# Altium PCB Copy of PCB1.PcbDoc
Units mil, origin at the board's own origin, x right, y up, seen from the top; angles counter-clockwise.
Board outline 5045.03 x 3965.01 mil, 2 copper layers (Top Layer, Bottom Layer); 78 components, 73 nets, 208 pads, 104 vias.
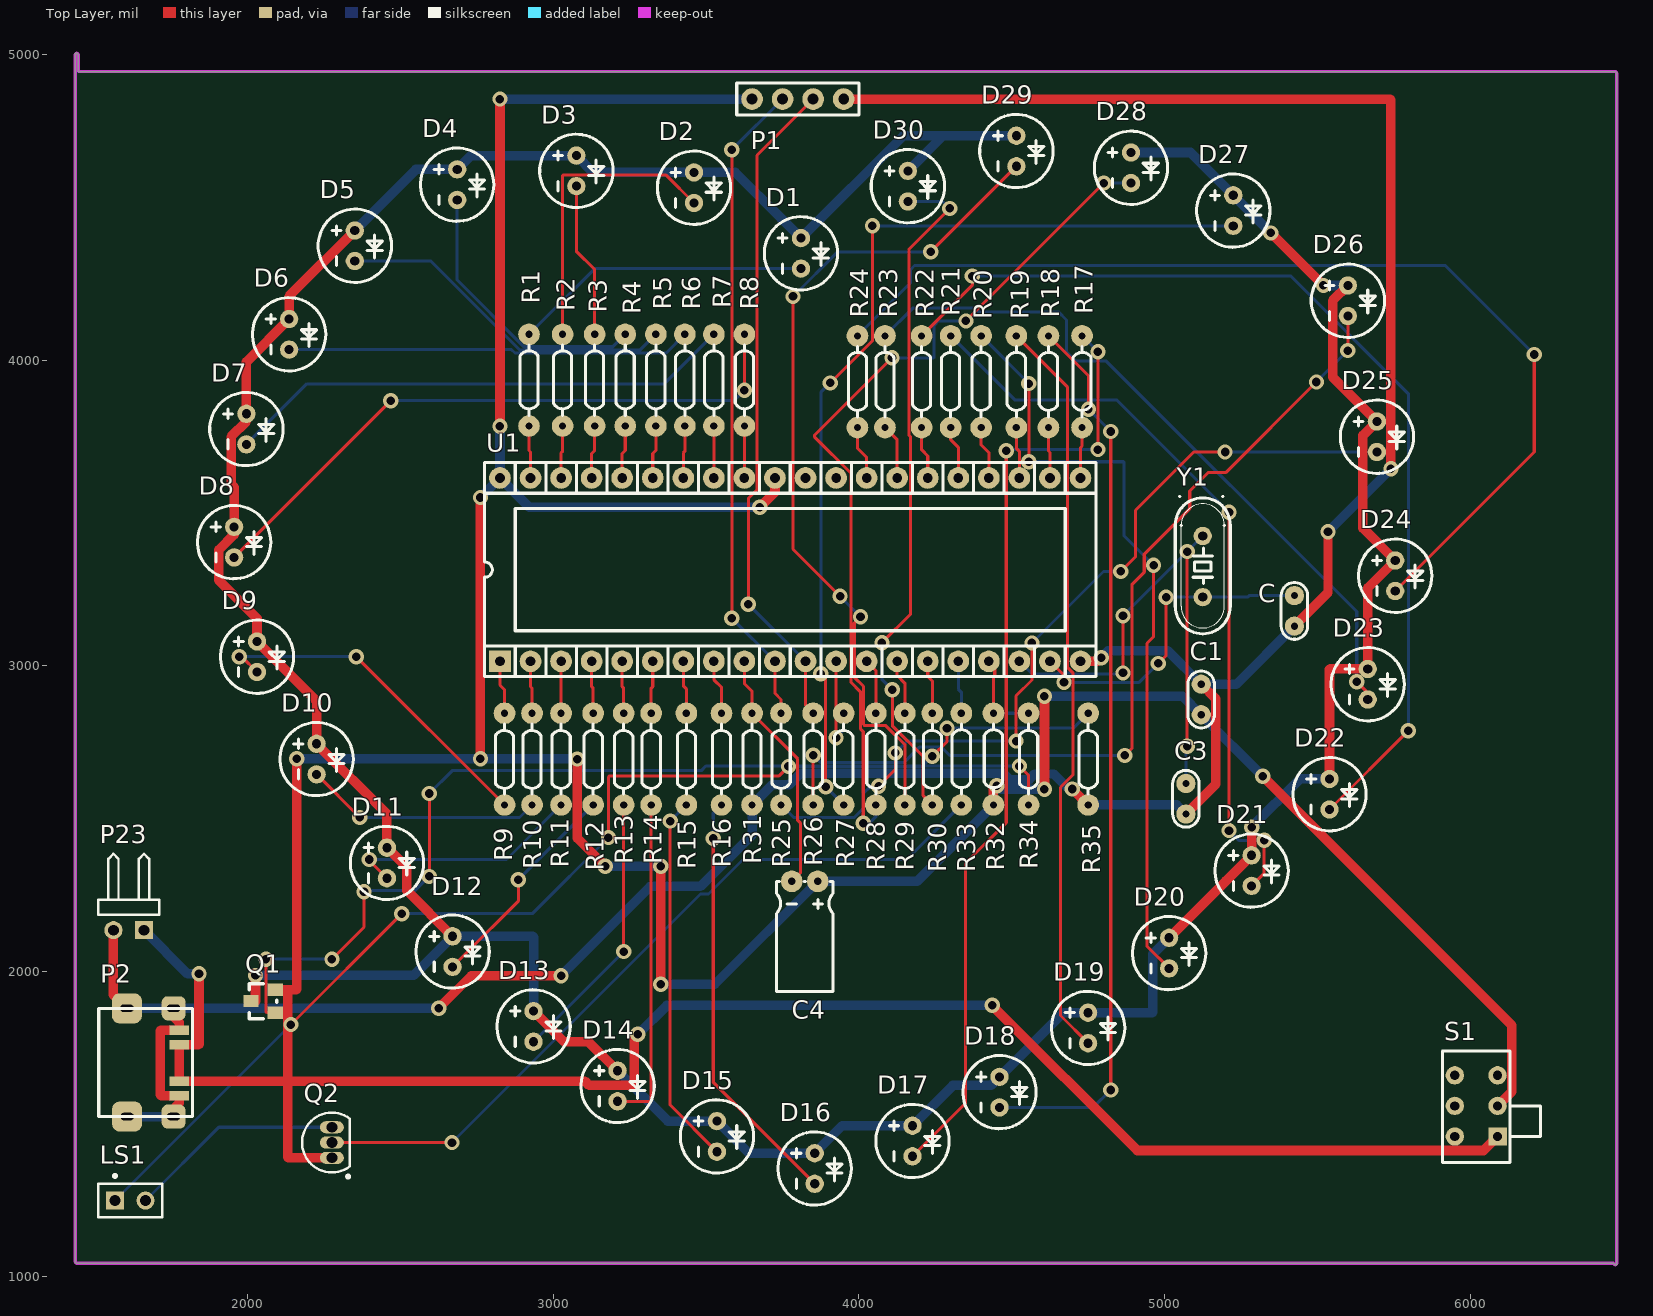
[diagram p0: Top Layer view]
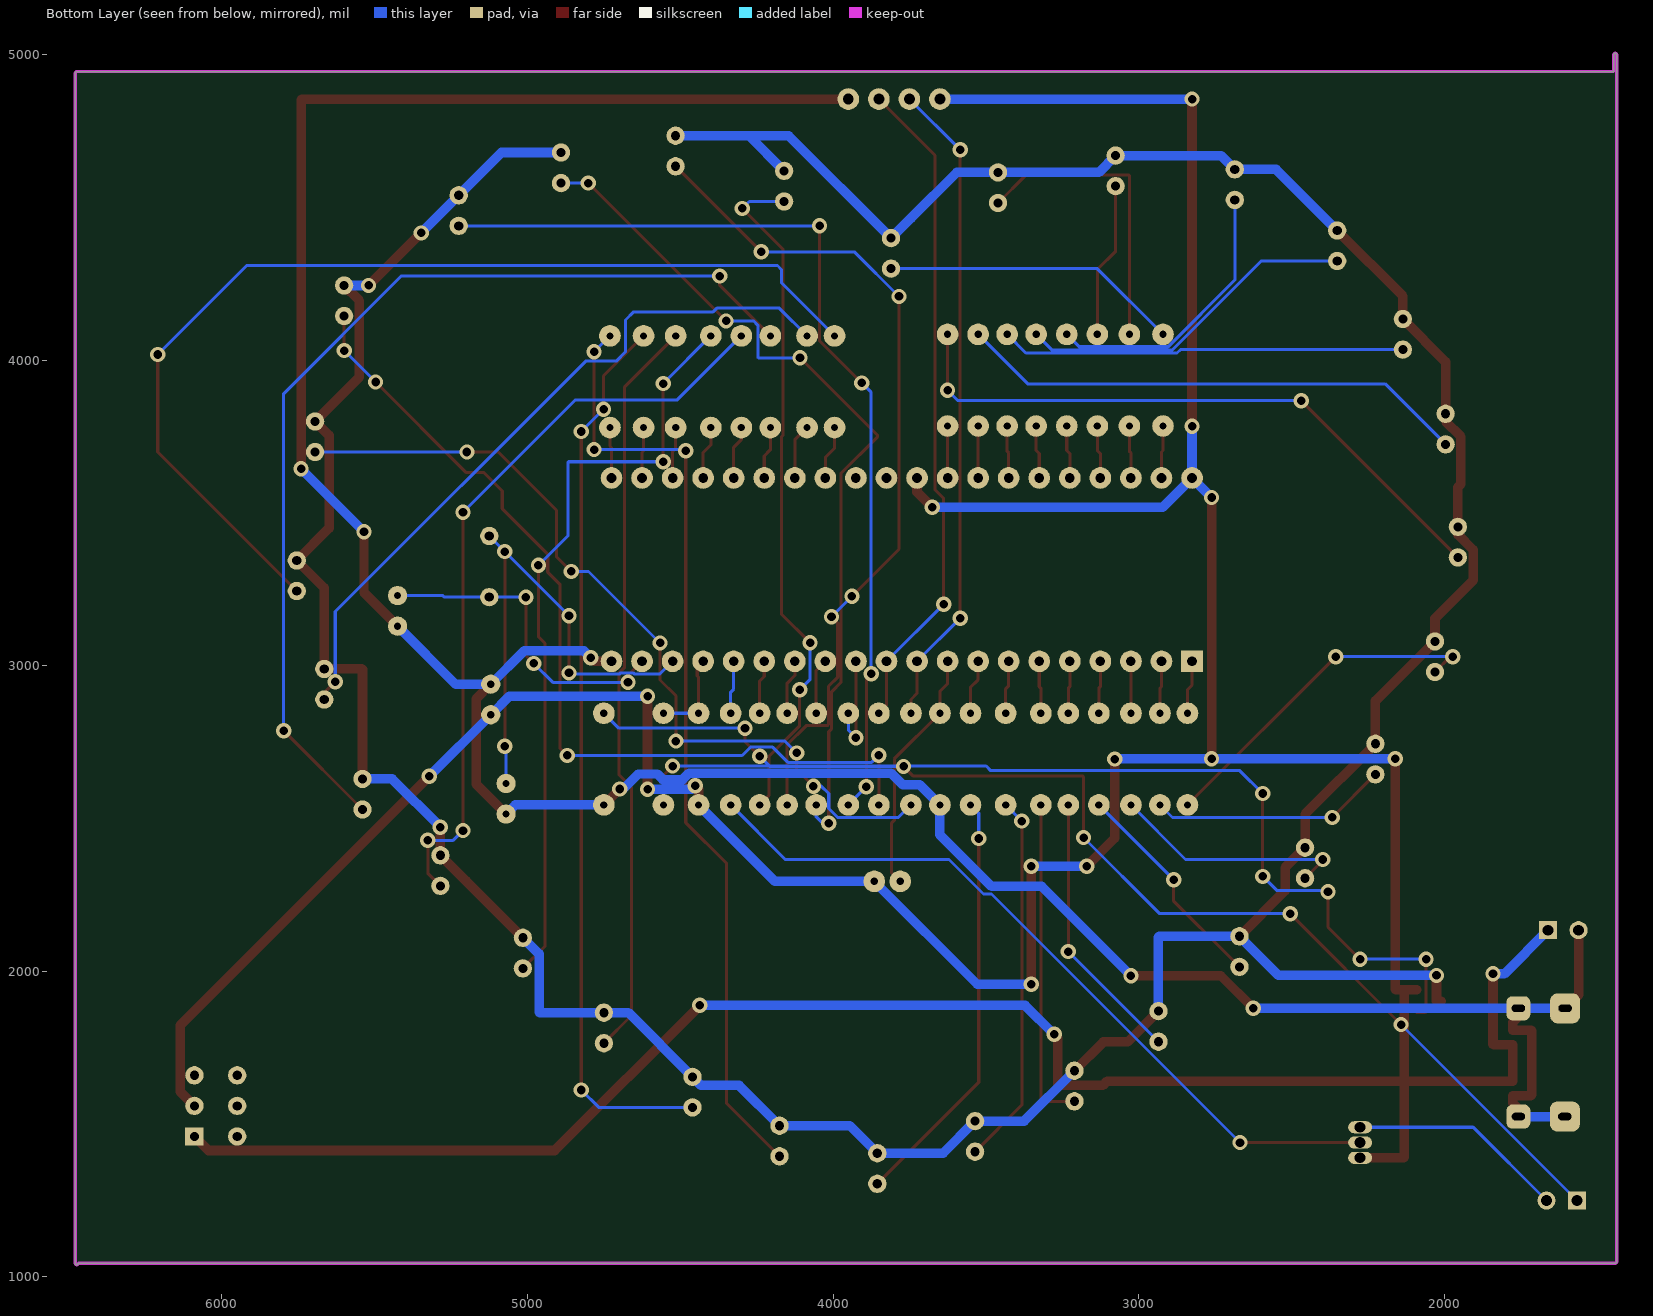
[diagram p1: Bottom Layer view, seen from below]

## Layer stack, top to bottom
Top Solder: solder mask 0.4, Solder Resist, Dk 3.5
Top Layer: signal copper 1.4
Dielectric 1: dielectric 12.6, FR-4, Dk 4.8
Bottom Layer: signal copper 1.4
Bottom Solder: solder mask 0.4, Solder Resist, Dk 3.5

## Board outline
1434.98,1050 ccw(c1440,1050) 1440,1044.98 6469.98,1044.98 ccw(c6475,1045) 6480.02,1045 6480.02,4940 ccw(c6475,4940) 6475,4945.02 1445.02,4945.02 1445.02,5000 ccw(c1440,5000) 1434.98,5000

## Design rules (kind name [scope] priority, off if disabled: settings)
Clearance [All] p1: gap=0.1 ignorepadtopadclearanceinfootprint=TRUE
MinimumSolderMaskSliver [All] p1: minsoldermaskwidth=1
PolygonConnect [All] p1: connectstyle=Relief reliefconductorwidth=10 reliefentries=4 polygonreliefangle="90 Angle" airgapwidth=10
RoutingVias [All] p1: holewidth=28 width=50 viastyle="Through Hole" minholewidth=28 minwidth=50 maxholewidth=28 maxwidth=50
SilkToSilkClearance [All] p1: silktosilkclearance=1
SilkToSolderMaskClearance [IsPad] p1: minsilkscreentomaskgap=0 clearancetoexposedcopper=TRUE
SolderMaskExpansion [All] p1: expansion=4 istentingtop=FALSE
Width Width_4 [InNet('No Net')] p1: maxlimit=10 minlimit=10 preferedwidth=10
Width Width_3 [InNet('+5')] p2: maxlimit=31.5 minlimit=10 preferedwidth=31.5
Width Width_2 [InNet('+5V')] p3: maxlimit=31.5 minlimit=10 preferedwidth=31.5
Width Width_1 [InNet('GND')] p4: maxlimit=39.37 minlimit=10 preferedwidth=31
Width [InNet('+5VUSB')] p5: maxlimit=31.5 minlimit=10 preferedwidth=31.5
27 further rules are at their usual default settings.

## Components (designator, comment, footprint, x,y, rotation, side; value= is the part's Value field where it differs from the comment)
C "Cap" C-0.1 5425,3130 r90 top value=100pF
C1 "Cap" C-0.1 5120,2840 r90 top value=100pF
C3 "Cap" C-0.1 5070,2515 r90 top value=100pF
C4 "Cap Pol1" CD-0.2T 3865,2295 r270 top value=100pF
D1 "LED0" led5 3805,4365 r270 top
D2 "LED0" led5 3455,4580 r270 top
D3 "LED0" led5 3070,4635 r270 top
D4 "LED0" led5 2680,4590 r270 top
D5 "LED0" led5 2345,4390 r270 top
D6 "LED0" led5 2130,4100 r270 top
D7 "LED0" led5 1990,3790 r270 top
D8 "LED0" led5 1950,3420 r270 top
D9 "LED0" led5 2025,3045 r270 top
D10 "LED0" led5 2220,2710 r270 top
D11 "LED0" led5 2450,2370 r270 top
D12 "LED0" led5 2665,2080 r270 top
D13 "LED0" led5 2930,1835 r270 top
D14 "LED0" led5 3205,1640 r270 top
D15 "LED0" led5 3530,1475 r270 top
D16 "LED0" led5 3850,1370 r270 top
D17 "LED0" led5 4170,1460 r270 top
D18 "LED0" led5 4455,1620 r270 top
D19 "LED0" led5 4745,1830 r270 top
D20 "LED0" led5 5010,2075 r270 top
D21 "LED0" led5 5280,2345 r270 top
D22 "LED0" led5 5535,2595 r270 top
D23 "LED0" led5 5660,2955 r270 top
D24 "LED0" led5 5750,3310 r270 top
D25 "LED0" led5 5690,3765 r270 top
D26 "LED0" led5 5595,4210 r270 top
D27 "LED0" led5 5220,4505 r270 top
D28 "LED0" led5 4885,4645 r270 top
D29 "LED0" led5 4510,4700 r270 top
D30 "LED0" led5 4155,4585 r270 top
LS1 "Bell" PIN2 1565,1250 r0 top
P1 "Header 4H" SIP4 3650,4855 r0 top
P2 "USB TYPE-C" USBTYPEC6 1757,1525 r90 top
P23 "Header 2H" HDR1X2H 1660,2135 r180 top
Q1 "PMOS-2" sot23 2090,1865 r90 top
Q2 "2N3906" TO-92A 2275,1440 r0 top
R1 "Res2" R-0.3 2920,4085 r270 top value=1K
R2 "Res2" R-0.3 3030,4085 r270 top value=1K
R3 "Res2" R-0.3 3135,4085 r270 top value=1K
R4 "Res2" R-0.3 3235,4085 r270 top value=1K
R5 "Res2" R-0.3 3335,4085 r270 top value=1K
R6 "Res2" R-0.3 3430,4085 r270 top value=1K
R7 "Res2" R-0.3 3525,4085 r270 top value=1K
R8 "Res2" R-0.3 3625,4085 r270 top value=1K
R9 "Res2" R-0.3 2840,2545 r90 top value=1K
R10 "Res2" R-0.3 2930,2545 r90 top value=1K
R11 "Res2" R-0.3 3025,2545 r90 top value=1K
R12 "Res2" R-0.3 3130,2545 r90 top value=1K
R13 "Res2" R-0.3 3230,2545 r90 top value=1K
R14 "Res2" R-0.3 3320,2545 r90 top value=1K
R15 "Res2" R-0.3 3435,2545 r90 top value=1K
R16 "Res2" R-0.3 3550,2545 r90 top value=1K
R17 "Res2" R-0.3 4730,4080 r270 top value=1K
R18 "Res2" R-0.3 4620,4080 r270 top value=1K
R19 "Res2" R-0.3 4515,4080 r270 top value=1K
R20 "Res2" R-0.3 4400,4080 r270 top value=1K
R21 "Res2" R-0.3 4300,4080 r270 top value=1K
R22 "Res2" R-0.3 4205,4080 r270 top value=1K
R23 "Res2" R-0.3 4085,4080 r270 top value=1K
R24 "Res2" R-0.3 3995,4080 r270 top value=1K
R25 "Res2" R-0.3 3745,2545 r90 top value=1K
R26 "Res2" R-0.3 3850,2545 r90 top value=1K
R27 "Res2" R-0.3 3950,2545 r90 top value=1K
R28 "Res2" R-0.3 4055,2545 r90 top value=1K
R29 "Res2" R-0.3 4150,2545 r90 top value=1K
R30 "Res2" R-0.3 4240,2545 r90 top value=1K
R31 "Res2" R-0.3 3650,2545 r90 top value=1K
R32 "Res2" R-0.3 4440,2845 r270 top value=1K
R33 "Res2" R-0.3 4335,2845 r270 top value=1K
R34 "Res2" R-0.3 4555,2545 r90 top value=1K
R35 "Res2" R-0.3 4750,2545 r90 top value=1K
S1 "SW-SPST" onoff 6035,1490 r90 top
U1 "P89C51RC2BN/01" DIP40 2825,3015 r90 top
Y1 "XTAL" jz 5135,3330 r90 top

## Footprints (in the part's own frame and the unit in brackets; to place one, negate y for a bottom-side part, rotate by r counter-clockwise, add the part's x,y. Pads: shape width x height; smd on the part's side, far side on the other; paste and mask are expansions set on the pad)
C-0.1 [mm]
  round 1.6 hole 0.6: 1(0,0) 2(2.54,0)
  silkscreen extent -1.09,-1.1 3.63,1.1
CD-0.2T [mm]
  round 1.8 hole 0.6: 1(0,0) 2(0,-2.159)
  silkscreen extent 0,-3.43 9.14,1.27
DIP40 [mm]
  rect 1.8x1.8 hole 0.8: 1(0,0)
  round 1.8 hole 0.8: 2(0,-2.54) 3(0,-5.08) 4(0,-7.62) 5(0,-10.16) 6(0,-12.7) 7(0,-15.24) 8(0,-17.78) 9(0,-20.32) 10(0,-22.86) 11(0,-25.4) 12(0,-27.94) 13(0,-30.48) 14(0,-33.02) 15(0,-35.56) 16(0,-38.1) 17(0,-40.64) 18(0,-43.18) 19(0,-45.72) 20(0,-48.26) 21(15.24,-48.26) 22(15.24,-45.72) 23(15.24,-43.18) 24(15.24,-40.64) 25(15.24,-38.1) 26(15.24,-35.56) 27(15.24,-33.02) 28(15.24,-30.48) 29(15.24,-27.94) 30(15.24,-25.4) 31(15.24,-22.86) 32(15.24,-20.32) 33(15.24,-17.78) 34(15.24,-15.24) 35(15.24,-12.7) 36(15.24,-10.16) 37(15.24,-7.62) 38(15.24,-5.08) 39(15.24,-2.54) 40(15.24,0)
  silkscreen extent -1.27,-49.53 16.51,1.27
HDR1X2H [mm] "Connector; Header; 2 Position; Right Angle"
  rect 1.5x1.5 hole 0.9: 1(0,0)
  round 1.5 hole 0.9: 2(2.54,0)
  silkscreen extent -1.27,-6.35 3.81,-1.27
jz [mil]
  round 60 hole 30: 1(-105,10) 2(95,10)
  silkscreen extent -225,-80 225,100
led5 [mil]
  round 60 hole 30: 1(-35,5) 2(65,5)
  silkscreen extent -105,-115 135,125
onoff [mil]
  rect 60x60 hole 30: 1(-30,-55)
  round 60 hole 30: 2(70,-55) 3(170,-55) 4(170,85) 5(70,85) 6(-30,85)
  silkscreen extent -115,-195 250,125
PIN2 [mm] "Photosensitive Diode; 2 Leads"
  rect 1.5x1.5 hole 0.9: 1(0,0)
  round 1.5 hole 0.9: 2(2.54,0)
  silkscreen extent -1.4,-1.4 3.94,2.17
R-0.3 [mm]
  round 1.8 hole 0.6: 1(0,0) 2(7.62,0)
  silkscreen extent 0.89,-0.76 6.73,0.75
SIP4 [mm]
  round 1.8 hole 0.9: 1(0,0) 2(2.54,0) 3(5.08,0) 4(7.62,0)
  silkscreen extent -1.27,-1.32 8.89,1.35
sot23 [mil]
  rect 40x50 smd: 1(0,0) 2(75,0) 3(38,80)
  silkscreen extent -20,-5 95,85
TO-92A [mm] "TO, Flat Index; 3 In-Line, Axial Leads; Body Dia. 4.5mm; Leads 0.51 x 0.48 mm (max)"
  oval 2x1 hole 0.9: 1(0,-1.27) 2(0,0) 3(0,1.27)
  silkscreen extent -2.48,-2.95 1.5,2.48, body extent -2.48,-2.5 1.5,2.5, height 6.86
USBTYPEC6 [mm]
  rrect50% 2.5x2.5 hole 0.6 slot 1.1 at 90 deg: 0(0,3.861) 0(9,3.886)
  rrect50% 2x2 hole 0.6 slot 1.1 at 90 deg: 0(0,0) 0(9,0)
  rect 0.8x1.6 smd: 1(1.727,-0.457) 2(2.946,-0.457) 5(5.972,-0.457) 6(7.188,-0.457)
  silkscreen extent 0,-1.57 9,6.22

## Part data
C C1 C3: "Capacitor", LatestRevisionDate=17-Jul-2002, LatestRevisionNote="Re-released for DXP Platform.", PackageDescription="Radial Cap, Thru-Hole; 2 Leads; 0.3 in Pin Spacing", PackageReference=RAD-0.3, Published=8-Jun-2000, Publisher="Altium Limited"
C4: "Polarized Capacitor (Radial)", LatestRevisionDate=17-Jul-2002, LatestRevisionNote="Re-released for DXP Platform.", PackageDescription="Polarized Capacitor (Radial); 2 Leads", PackageReference=RB7.6-15, Published=8-Jun-2000, Publisher="Altium Limited"
D1 D2 D3 D4 D5 D6 D7 D8 D9 D10 D11 D12 D13 D14 D15 D16 D17 D18 D19 D20 D21 D22 D23 D24 D25 D26 D27 D28 D29 D30: "Typical INFRARED GaAs LED", LatestRevisionDate=08-Jul-2005, LatestRevisionNote="Mech Layer 1 removed.", PackageDescription="LED; 2 Leads", PackageReference=LED-0, Published=8-Jun-2000, Publisher="Altium Limited"
LS1: "Electrical Bell", LatestRevisionDate=17-Jul-2002, LatestRevisionNote="Re-released for DXP Platform.", PackageReference=PIN2, Published=24-Mar-1999, Publisher="Altium Limited"
P1: "Header, 4-Pin, Right Angle", LatestRevisionDate=17-Jul-2002, LatestRevisionNote="Re-released for DXP Platform.", Publisher="Altium Limited"
P2: library part "USB TYPE-C 6P", Current Rating - Power (Max)=5A, JLCPCB Part Class="Extended Part", Manufacturer Part="TYPE-C 6P CB1.6(073)", Add into BOM=yes, Connector Type=Type-C, Convert to PCB=yes, Datasheet=https://atta.szlcsc.com/upload/public/pdf/source/20220408/7E0E465C11F85B3C51A520D1219A5616.pdf, Device="TYPE-C 6P CB1.6(073)", Number of Contacts=6P, Number of Ports=1, Standard=-, Supplier=LCSC, Supplier Footprint=SMD, Supplier Part=C2858274, Symbol="TYPE-C 6P CB1.6(073)"
P23: "Header, 2-Pin, Right Angle", LatestRevisionDate=17-Jul-2002, LatestRevisionNote="Re-released for DXP Platform.", Publisher="Altium Limited"
Q1: library part AO3401, "P-Channel Power MOSFET", Code_JEDEC=TO-220-AB, ComponentLink1Description="Manufacturer Link", ComponentLink1URL=http://www.irf.com/, DatasheetDocument=PD-9.390D, LatestRevisionDate=17-Jul-2002, LatestRevisionNote="Re-released for DXP Platform.", Note="Pin 4 not drawn and electrically connected to Pin 2.", PackageReference=TO-220AB, Published=8-Jun-2000, Publisher="Altium Limited"
Q2: "PNP General Purpose Amplifier", ComponentLink1Description="Manufacturer Link", ComponentLink1URL=http://www.fairchildsemi.com/, ComponentLink2Description=Datasheet, ComponentLink2URL=http://www.fairchildsemi.com/ds/2N%2F2N3906.pdf, DatasheetVersion=1997, LatestRevisionDate=15-Jan-2003, LatestRevisionNote="PCB Footprint 'BCY-W3/D4.7' replaced", PackageDescription="TO, Flat Index; 3 In-Line, Axial Leads; Body Dia. 4.5mm; Leads 0.51 x 0.48 mm (max)", PackageReference=TO-92A, PackageVersion=Sep-1998, Published=8-Jun-2000, Publisher="Altium Limited"
R1 R2 R3 R4 R5 R6 R7 R8 R9 R10 R11 R12 R13 R14 R15 R16 R17 R18 R19 R20 R21 R22 R23 R24 R25 R26 R27 R28 R29 R30 R31 R32 R33 R34 R35: "Resistor", LatestRevisionDate=17-Jul-2002, LatestRevisionNote="Re-released for DXP Platform.", PackageDescription="Axial Device, Thru-Hole; 2 Leads; 0.4 in Pin Spacing", PackageReference=AXIAL-0.4, Published=8-Jun-2000, Publisher="Altium Limited"
S1: "Single-Pole, Single-Throw Switch", LatestRevisionDate=17-Jul-2002, LatestRevisionNote="Re-released for DXP Platform.", PackageDescription="Switch; 2 Leads", PackageReference=SPST-2, Published=24-Mar-1999, Publisher="Altium Limited"
U1: "80C51 8-Bit Flash Microcontroller Family, 32 kB ISP/IAP Flash with 512 B RAM.", Code_JEDEC=MO-015, ComponentLink1Description="Manufacturer Link", ComponentLink1URL=http://www-us2.semiconductors.philips.com/, ComponentLink2Description=Datasheet, ComponentLink2URL=http://www.semiconductors.philips.com/acrobat/datasheets/P89C51RA2_RB2_RC2_RD2_2.pdf, DatasheetVersion=18-Jul-2002, PackageDescription="DIP, Plastic; 40 Leads; Row Spacing 15.24 mm; Pitch 2.54 mm", PackageReference=SOT129-1, PackageVersion=Aug-2000, Published=21-May-2003, Publisher="Altium Limited"
Y1: "Crystal Oscillator", LatestRevisionDate=17-Jul-2002, LatestRevisionNote="Re-released for DXP Platform.", PackageDescription="Crystal, Thru-Hole; 2 Leads; Body 3.1 x 8.2 mm (Dia.xH)", PackageReference=R38, Published=8-Jun-2000, Publisher="Altium Limited"

## Via types
v1: diameter 50, hole 28, Top Layer to Bottom Layer, 104 vias

## Nets (pads, with @x,y where several pads share a name; then routed paths per layer and width w, separated by ;. In a path a pad name is that pad's centre, name@x,y a point inside that pad or via, vN(x,y) a via of type N, cw(c..) or ccw(c..) an arc to the next point about the centre after c; other vN are vias at no path point)
+5: D1.1 D2.1 D3.1 D4.1 D5.1 D6.1 D7.1 D8.1 D9.1 D10.1 D11.1 D12.1 D13.1 D14.1 D15.1 D16.1 D17.1 D18.1 D19.1 D20.1 D21.1 D22.1 D23.1 D24.1 D25.1 D26.1 D27.1 D28.1 D29.1 D30.1 Q1.3 | length 13324.5
  Top Layer w31.5: Q1.3 2025,1903 v1(2025,1987) ; D5.1 2135,4210 D6.1 1995,3995 D7.1 1995,3800 1945,3750 1945,3595 1955,3585 D8.1 1955,3430 1905,3380 1905,3280 2030,3155 D9.1 2225,2885 D10.1 2455,2515 D11.1 2520.55,2339.45 2520.55,2264.45 D12.1 ; D13.1 3035.41,1769.59 3115.41,1769.59 D14.1 ; D20.1 5201.18,2296.18 D21.1 v1(5285,2472) ; v1(5348,4417) v1(5520,4245) ; D22.1 5540,2988 5542,2990 D23.1 5665,3255 D24.1 5649,3451 5649,3754 D25.1 5550.18,3944.82 5550.18,4195.18 D26.1
  Bottom Layer w31.5: v1(2025,1987) 2542,1987 D12.1 2932,2115 2935,2112 D13.1 ; D5.1 2550,4625 D4.1 2730,4670 D3.1 3130,4615 D2.1 3595,4615 3744.1,4465.9 D1.1 4145,4735 D29.1 4275,4735 D30.1 ; D14.1 3375,1510 D15.1 3640,1405 D16.1 3945,1495 D17.1 4307.03,1627.03 4432.03,1627.03 D18.1 4670,1865 D19.1 4960,1865 4962,1867 4962,2057 D20.1 ; D28.1 5085,4680 D27.1 v1(5348,4417) ; v1(5285,2472) 5443,2630 D22.1 ; v1(5520,4245) D26.1
+5V: C1.1 C4.1 P1.1 Q1.2 Q2.1 R32.2 S1.2 U1.31 U1.40 | length 12518.3
  Top Layer w31.5: v1(2160,2696) 2160,1942 2158,1940 Q1.2 2129,1940 2131,1938 2131,1392 2133,1390 Q2.1 ; v1(2825,3784) v1(2825,4855) ; v1(3078,2695) 3078,2436 v1(3170,2344) ; v1(3351,1958) v1(3351,2344) ; v1(3675,3519) 3725,3569 U1.31 ; R32.2 4440,2597 v1(4451,2608) ; v1(4607,2596) v1(4607,2901) ; v1(5321,2639) 6136,1824 6136,1606 S1.2 ; v1(2761,2696) v1(2761,3551) v1(2761,2696)
  Bottom Layer w31.5: v1(2160,2696) v1(2761,2696) 3077,2696 v1(3078,2695) ; v1(2825,3784) U1.40 ; v1(2825,4855) P1.1 ; v1(3170,2344) v1(3351,2344) ; v1(3351,1958) 3528,1958 C4.1 4190,2295 R32.2 ; v1(3675,3519) 2921,3519 U1.40 ; v1(4451,2608) 4462.72,2596.28 4606.72,2596.28 v1(4607,2596) ; v1(4607,2901) 5059,2901 C1.1 v1(5321,2639) ; U1.40 v1(2761,3551) U1.40
  other v1: 2761,2696 2761,3551
+5VUSB: P2.2 P2.5 P23.1 S1.1 | length 5388.8
  Top Layer w31.5: v1(1840,1992) 1840,1762.11 1838,1760.11 P2.5 1775,1700 P2.2 3103,1641 3117,1627 3262,1627 3264,1629 3264,1782 v1(3276,1794) ; v1(4436,1889) 4911,1414 6044,1414 S1.1
  Bottom Layer w31.5: P23.1 1803,1992 v1(1840,1992) ; v1(3276,1794) 3371,1889 v1(4436,1889)
GND: C1.2 C3.1 C.1 P1.4 P2.0 P2.1 P2.6 P23.2 R31.1 R35.1 U1.20 | length 9797.8
  Top Layer w31: P23.2 1560,1923.33 P2.0@1604,1879.33 ; P2.0@1757,1525 1757,1550 1775,1568 P2.1 1716,1593 1713,1596 1713,1806 1715,1808 P2.6 1775,1834 1757,1852 P2.0@1757,1879.33 ; v1(2624.33,1879.33) 2731,1986 v1(3025,1986) ; P1.4 5738,4855 5741,4852 v1(5741,3645) ; v1(4698,2597) R35.1 ; U1.20 4781,3015 v1(4793,3027) ; C3.1 5168,2613 5168,2892 C1.2 ; C.1 5535,3240 v1(5535,3439)
  Bottom Layer w31: P2.0@1604,1879.33 1680,1879.33 1757,1879.33 v1(2624.33,1879.33) ; P2.0@1605,1525 1681,1525 P2.0@1757,1525 ; v1(3025,1986) 3317,2278 3481,2278 3650,2447 R31.1 3716.46,2611.46 3772.29,2611.46 3809.87,2649.03 4471.15,2649.03 4492.47,2627.71 4556.48,2627.71 4574.9,2646.13 4637.6,2646.13 4686.73,2597 v1(4698,2597) ; R35.1 5040,2545 C3.1 ; v1(4793,3027) 4815,3049 5011,3049 C1.2 5235,2940 C.1 ; v1(5535,3439) v1(5741,3645)
NetD1_2: D1.2 R1.1 | length 979.1
  Bottom Layer w10: R1.1 3135,4300 D1.2
NetD2_2: D2.2 R2.1 | length 987.5
  Top Layer w10: R2.1 3030,4604 3032,4606 3369,4606 D2.2
NetD3_2: D3.2 R3.1 | length 509.9
  Top Layer w10: D3.2 3075,4357 3135,4297 R3.1
NetD4_2: D4.2 R4.1 | length 919.5
  Bottom Layer w10: D4.2 2685,4262.68 2903.21,4044.47 3194.47,4044.47 R4.1
NetD5_2: D5.2 R5.1 | length 1126.4
  Bottom Layer w10: D5.2 2598.47,4325 2889.1,4034.37 3284.37,4034.37 R5.1
NetD6_2: D6.2 R6.1 | length 1324.8
  Bottom Layer w10: D6.2 2862.97,4035 2874,4023.97 3368.97,4023.97 R6.1
NetD7_2: D7.2 R7.1 | length 1679.1
  Bottom Layer w10: D7.2 2193,3923 3363,3923 R7.1
NetD8_2: D8.2 R8.1 | length 2079.6
  Top Layer w10: D8.2 v1(2468,3868) ; v1(3625,3902) R8.1
  Bottom Layer w10: v1(2468,3868) 3591,3868 v1(3625,3902)
NetD9_2: D9.2 R9.1 | length 1147.6
  Top Layer w10: v1(1972,3030) 1980,3030 D9.2 ; v1(2355,3030) R9.1
  Bottom Layer w10: v1(1972,3030) v1(2355,3030)
NetD10_2: D10.2 R10.1 | length 780.4
  Top Layer w10: D10.2 v1(2366,2504)
  Bottom Layer w10: v1(2366,2504) 2889,2504 R10.1
NetD11_2: D11.2 R11.1 | length 787.4
  Top Layer w10: v1(2397,2366.33) 2397,2363 D11.2
  Bottom Layer w10: v1(2397,2366.33) 2846.33,2366.33 R11.1
NetD12_2: D12.2 R12.1 | length 720.5
  Top Layer w10: D12.2 2709.08,2054.08 2885,2230 v1(2885,2300)
  Bottom Layer w10: v1(2885,2300) R12.1
NetD13_2: D13.2 R13.1 | length 897.2
  Top Layer w10: v1(3230,2065) R13.1
  Bottom Layer w10: D13.2 v1(3230,2065)
NetD14_2: D14.2 R14.1 | length 1078.8
  Top Layer w10: D14.2 3318,1575 3320,1577 R14.1
NetD15_2: D15.2 R15.1 | length 1220.3
  Top Layer w10: v1(3382,2492) 3382,1563 D15.2
  Bottom Layer w10: v1(3382,2492) R15.1
NetD16_2: D16.2 R16.1 | length 1388.7
  Top Layer w10: v1(3523,2435) 3523,1637 D16.2
  Bottom Layer w10: v1(3523,2435) 3523,2518 R16.1
NetD17_2: D17.2 R17.1 | length 3131.4
  Top Layer w10: D17.2 4348,1568 4348,2353 4482,2487 v1(4482,3704) ; v1(4782,3708) v1(4782,4028)
  Bottom Layer w10: v1(4482,3704) 4486,3708 v1(4782,3708) ; R17.1 v1(4782,4028)
NetD18_2: D18.2 R18.1 | length 2940.1
  Top Layer w10: R18.1 4751,3949 v1(4751,3840) ; v1(4824,1612) v1(4824,3767)
  Bottom Layer w10: D18.2 4767,1555 v1(4824,1612) ; v1(4751,3840) v1(4824,3767)
NetD19_2: D19.2 R19.1 | length 2446.9
  Top Layer w10: R19.1 4682,3913 4682,2995.2 4701.1,2976.1 4701.1,2644.28 4659.37,2602.55 4659.37,1855.63 D19.2
NetD20_2: D20.2 R20.1 | length 2523.8
  Top Layer w10: v1(4556,3668) v1(4556,3924) ; v1(4964,3329) 4964,3095.03 4942.9,3073.93 4942.9,2082.1 D20.2
  Bottom Layer w10: R20.1 v1(4556,3924) ; v1(4556,3668) 4866,3668 4868,3666 4868,3425 v1(4964,3329)
NetD21_2: D21.2 R21.1 | length 2485.8
  Top Layer w10: v1(5211,2461) v1(5211,3502.33) ; D21.2 5326,2321 v1(5326,2429)
  Bottom Layer w10: R21.1 4509.37,3870.63 4842.69,3870.63 v1(5211,3502.33) ; v1(5211,2461) 5243,2429 v1(5326,2429)
NetD22_2: D22.2 R22.1 | length 3318.6
  Top Layer w10: R22.1 4371,4246 v1(4371,4275.68) ; D22.2 v1(5798,2788)
  Bottom Layer w10: v1(4371,4275.68) 5413.32,4275.68 5798,3891 v1(5798,2788)
NetD23_2: D23.2 R23.1 | length 2356.5
  Top Layer w10: v1(5629,2948) 5665,2912 D23.2
  Bottom Layer w10: R23.1 4175.63,4170.63 4380.1,4170.63 4392.14,4158.6 4652.28,4158.6 4678.87,4132 4678.87,4028 4709.49,3997.39 4809.61,3997.39 5629,3178 v1(5629,2948)
NetD24_2: D24.2 R24.1 | length 3418.6
  Top Layer w10: D24.2 6210,3700 v1(6210,4019)
  Bottom Layer w10: R24.1 4168.47,4253.47 4168.47,4296.63 4181.84,4310 5919,4310 v1(6210,4019)
NetD25_2: D25.2 R25.1 | length 2769.3
  Top Layer w10: v1(4064,2606) 4119,2661 v1(4119,2715) ; v1(4514,2754) 4514,2902 4566,2954 v1(4566,3075) ; v1(4857,3309) 4905,3357 4905,3509 5096,3700 v1(5198,3700)
  Bottom Layer w10: R25.1 3786,2504 3985,2504 4014,2533 4014,2582 4038,2606 v1(4064,2606) ; v1(4119,2715) 4158,2754 v1(4514,2754) ; v1(4566,3075) 4800,3309 v1(4857,3309) ; v1(5198,3700) D25.2
NetD26_2: D26.2 R26.1 | length 2998.6
  Top Layer w10: R26.1 v1(3850,2707.87) ; v1(4870,2706.87) 4894.1,2730.97 4894.1,3267.41 4933.59,3306.9 4933.59,3365.59 5082.56,3514.56 5082.56,3572 5144.11,3633.55 5201.55,3633.55 v1(5497,3929) ; v1(5600,4032) D26.2
  Bottom Layer w10: v1(3850,2707.87) 3873.49,2684.39 4148,2684.39 4197.71,2734.1 4270.1,2734.1 4297.33,2706.87 v1(4870,2706.87) ; v1(5497,3929) v1(5600,4032)
NetD27_2: D27.2 R27.1 | length 3177.1
  Top Layer w10: v1(3875,2974) 3891,2958 v1(3891,2604) ; v1(3906,3926) 4044,4064 v1(4044,4440)
  Bottom Layer w10: v1(3875,2974) 3875,3895 v1(3906,3926) ; v1(3891,2604) R27.1 ; v1(4044,4440) D27.2
NetD28_2: D28.2 R28.1 | length 2863.6
  Top Layer w10: v1(4014,2485) 4013.9,2485.1 4013.9,2784.83 4004.37,2794.37 4004.37,2915.63 3974.37,2945.63 3974.37,3629.63 3854,3750 3854,3754 v1(4108,4008) ; v1(4350,4129) v1(4801,4580)
  Bottom Layer w10: v1(4014,2485) 4034,2485 4055,2506 R28.1 ; v1(4108,4008) 4244,4008 4246,4010 4246,4115 4260,4129 v1(4350,4129) ; v1(4801,4580) D28.2
NetD29_2: D29.2 R29.1 | length 2781.1
  Top Layer w10: v1(3784,4209) 3784,3382 v1(3938,3228) ; v1(4005,3161) 3984.47,3140.47 3984.47,2963 4014.47,2933 4014.47,2808 4018,2804.47 4088,2804.47 4150,2742.47 R29.1 ; v1(4235,4355) D29.2
  Bottom Layer w10: v1(3784,4209) 3930,4355 v1(4235,4355) ; v1(3938,3228) v1(4005,3161)
NetD30_2: D30.2 R30.1 | length 2263
  Top Layer w10: v1(4075,3076) 4169,3170 4169,3749 4164,3754 4164,4364 v1(4297,4497) ; v1(4109,2922) 4109,2804 4209.9,2703.1 4209.9,2575.1 R30.1
  Bottom Layer w10: v1(4075,3076) 4075,2956 v1(4109,2922) ; D30.2 4274,4520 v1(4297,4497)
NetLS1_1: LS1.1 R35.2 | length 3988
  Top Layer w10: v1(2141,1826) v1(2504,2189) ; v1(3180,2438) 3180,2637 3182,2639 3737,2639 v1(3769,2671) ; v1(4240,2704) 4288,2752 v1(4288,2796)
  Bottom Layer w10: LS1.1 v1(2141,1826) ; v1(2504,2189) 2931,2189 v1(3180,2438) ; v1(3769,2671) 4207,2671 v1(4240,2704) ; v1(4288,2796) 4701,2796 R35.2
NetLS1_2: LS1.2 Q2.3 | length 709.4
  Bottom Layer w10: LS1.2 1905,1490 Q2.3
NetQ1_1: Q1.1 R34.1 | length 3298.3
  Top Layer w10: v1(2059,2040) 2059,1868 2062,1865 Q1.1 ; v1(2275,2040) 2380,2145 v1(2380,2261) ; v1(2594,2311) v1(2594,2582.22) ; v1(4525,2672) 4555,2642 R34.1
  Bottom Layer w10: v1(2059,2040) v1(2275,2040) ; v1(2380,2261) 2384.2,2265.2 2548.2,2265.2 v1(2594,2311) ; v1(2594,2582.22) 2668.78,2657 3484,2657 3499,2672 v1(4525,2672)
NetQ2_2: Q2.2 R33.2 | length 2517.7
  Top Layer w10: Q2.2 v1(2668,1440)
  Bottom Layer w10: v1(2668,1440) 3481.27,2253.27 3507.22,2253.27 3620.35,2366.4 4156.4,2366.4 R33.2
P00: R1.2 U1.39 | length 172.1
  Top Layer w10: R1.2 2920,3705 2925,3700 U1.39
P01: R2.2 U1.38 | length 172.1
  Top Layer w10: U1.38 3025,3697 3030,3702 R2.2
P02: R3.2 U1.37 | length 174.1
  Top Layer w10: U1.37 3125,3695 3135,3705 R3.2
P03: R4.2 U1.36 | length 174.1
  Top Layer w10: U1.36 3225,3695 3235,3705 R4.2
P04: R5.2 U1.35 | length 174.1
  Top Layer w10: U1.35 3325,3695 3335,3705 R5.2
P05: R6.2 U1.34 | length 172.1
  Top Layer w10: U1.34 3425,3697 3430,3702 R6.2
P06: R7.2 U1.33 | length 170
  Top Layer w10: U1.33 3525,3700 R7.2
P07: R8.2 U1.32 | length 170
  Top Layer w10: U1.32 R8.2
P10: R9.2 U1.1 | length 176.2
  Top Layer w10: U1.1 2825,2937 2840,2922 R9.2
P11: R10.2 U1.2 | length 172.1
  Top Layer w10: U1.2 2925,2932 2930,2927 R10.2
P12: R11.2 U1.3 | length 170
  Top Layer w10: R11.2 3025,2930 U1.3
P13: R12.2 U1.4 | length 172.1
  Top Layer w10: U1.4 3125,2932 3130,2927 R12.2
P14: R13.2 U1.5 | length 172.1
  Top Layer w10: U1.5 3225,2932 3230,2927 R13.2
P15: R14.2 U1.6 | length 172.1
  Top Layer w10: R14.2 3320,2927 3325,2932 U1.6
P16: R15.2 U1.7 | length 174.1
  Top Layer w10: U1.7 3425,2935 3435,2925 R15.2
P17: R16.2 U1.8 | length 180.4
  Top Layer w10: U1.8 3525,2955 3550,2930 R16.2
P20: R17.2 U1.21 | length 167.1
  Top Layer w10: U1.21 4725,3713.9 4730,3718.9 R17.2
P21: R18.2 U1.22 | length 167.1
  Top Layer w10: R18.2 4620,3703 4625,3698 U1.22
P22: R19.2 U1.23 | length 169.1
  Top Layer w10: R19.2 4515,3712 4525,3702 U1.23
P23: R20.2 U1.24 | length 175.4
  Top Layer w10: R20.2 4400,3723 4425,3698 U1.24
P24: R21.2 U1.25 | length 175.4
  Top Layer w10: R21.2 4300,3740.31 4325,3715.31 U1.25
P25: R22.2 U1.26 | length 173.3
  Top Layer w10: R22.2 4205,3707 4225,3687 U1.26
P26: R23.2 U1.27 | length 181.6
  Top Layer w10: R23.2 4125,3740 U1.27
P27: R24.2 U1.28 | length 177.4
  Top Layer w10: R24.2 3995,3712 4025,3682 U1.28
P30: P1.2 R25.2 U1.10 | length 2145.4
  Top Layer w10: v1(3584,3156) v1(3584,4689) ; U1.10 3725,2909.97 3745,2889.97 R25.2
  Bottom Layer w10: v1(3584,3156) U1.10 ; v1(3584,4689) P1.2
P31: P1.3 R26.2 U1.11 | length 2185.6
  Top Layer w10: v1(3638,3202) 3638,3548 3666,3576 3666,4671 P1.3 ; U1.11 3825,2870 R26.2
  Bottom Layer w10: v1(3638,3202) U1.11
P32: R27.2 U1.12 | length 340.4
  Top Layer w10: v1(3925,2765) U1.12
  Bottom Layer w10: v1(3925,2765) 3950,2790 R27.2
P33: R28.2 U1.13 | length 182.4
  Top Layer w10: U1.13 4055,2985 R28.2
P34: R29.2 U1.14 | length 180.4
  Top Layer w10: U1.14 4125,2968.23 4150,2943.23 R29.2
P35: R30.2 U1.15 | length 176.2
  Top Layer w10: U1.15 4225,2965.33 4240,2950.33 R30.2
P36: R33.1 U1.16 | length 174.1
  Bottom Layer w10: U1.16 4325,2923.9 4335,2913.9 R33.1
P37: R32.1 R34.2 U1.17 | length 294.8
  Top Layer w10: U1.17 4444.29,2995.71 4444.29,2966.96 4440,2962.68 4440,2940.57 R32.1
  Bottom Layer w10: R32.1 4497,2845 R34.2
RST: C4.2 R31.2 U1.9 | length 808.2
  Top Layer w10: U1.9 3625,2942 3650,2917 R31.2 3799.37,2695.63 3799.37,2494.37 3809,2484.73 3809,2324 C4.2
X1: C.2 U1.19 Y1.1 | length 1071.5
  Top Layer w10: U1.19 4671,2969 v1(4671,2946) ; v1(4979,3008) 5005.1,3034.1 v1(5005.1,3225)
  Bottom Layer w10: v1(4671,2946) 4917,2946 v1(4979,3008) ; v1(5005.1,3225) Y1.1 5272.03,3225 5277.03,3230 C.2
X2: C3.2 U1.18 Y1.2 | length 1748.6
  Top Layer w10: v1(4864,2977) v1(4864,3164) ; v1(5074,2737) v1(5074,3374)
  Bottom Layer w10: U1.18 4566,2974 4651,2974 4654,2977 4695,2977 4698,2974 4861,2974 v1(4864,2977) ; v1(4864,3164) Y1.2 v1(5074,3374) ; C3.2 5070,2733 v1(5074,2737)
pads on no net: S1.3 S1.4 S1.5 S1.6 U1.29 U1.30

## Keep-outs
Keep-Out Layer:
  the board outline again, w10

## Silkscreen, mask and mechanical layers (free items; w line width, h text height)
Mechanical 1:
  lines w10: 1440,4935 1445,4940 6475,4940 6475,1045 6470,1050 1440,1050 1440,5000